# EAGLE board attiny85 (EAGLE 7.7.0)
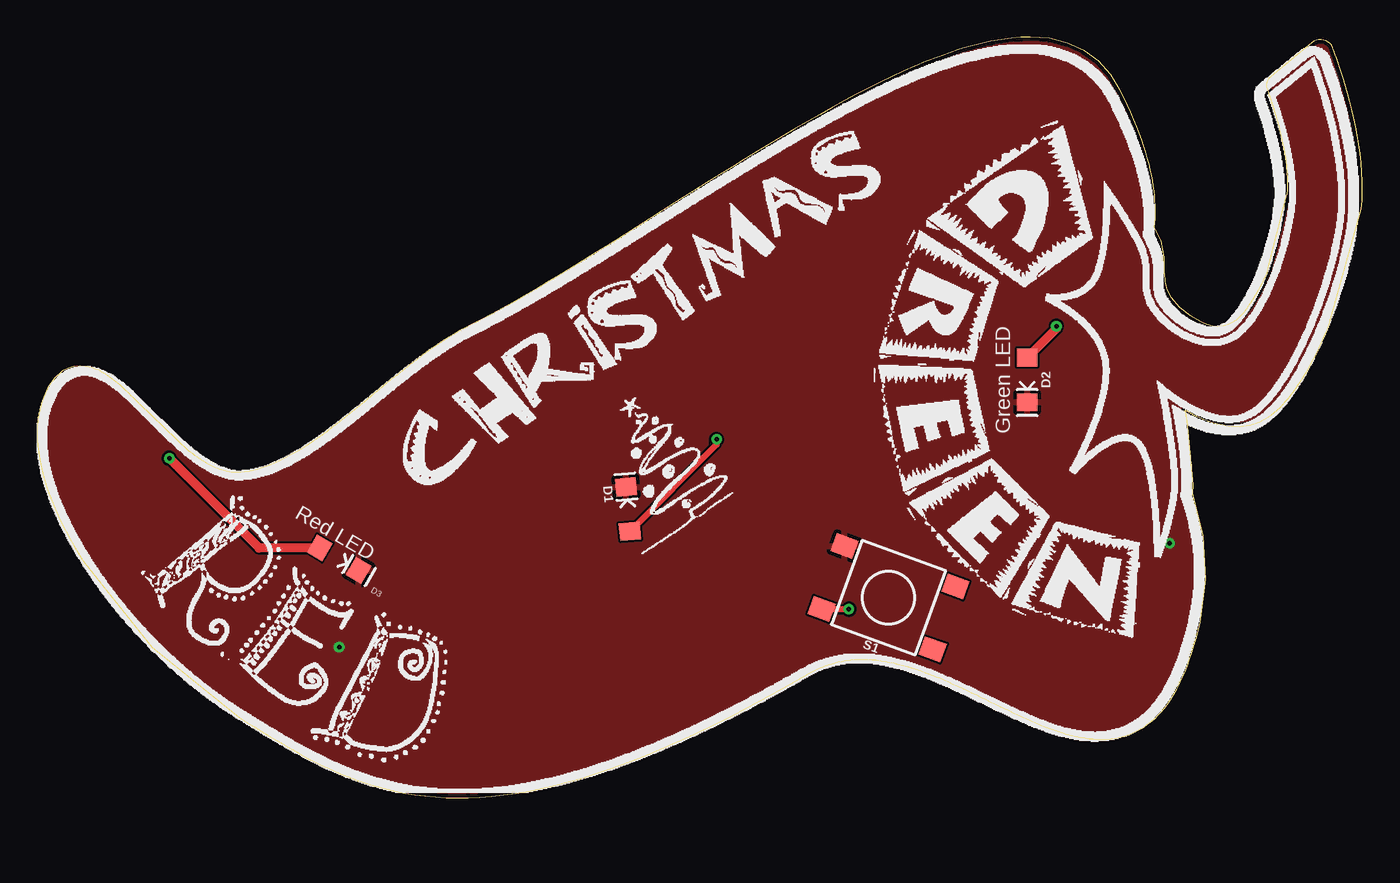
[diagram p0: board, top side]
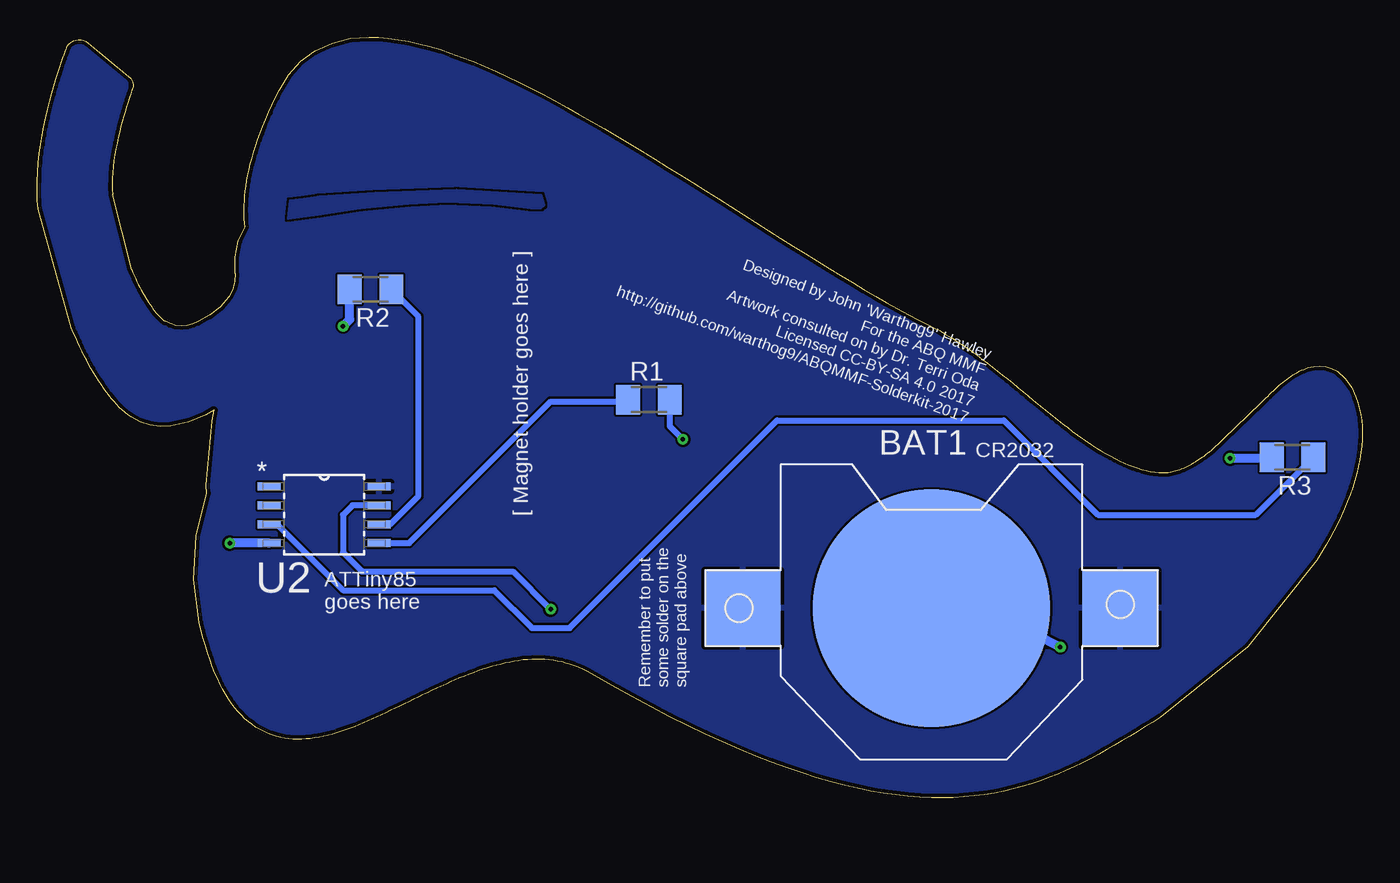
[diagram p1: board, bottom side, seen from below]

Size 89.17 x 51.2 mm. Coordinates in mm from the lower left corner, seen from the top.
Outline: 66.83,51.2 66.19,51.18 65.54,51.13 64.87,51.04 64.19,50.92 63.49,50.77 62.78,50.58 62.07,50.37 61.33,50.13 60.59,49.86 59.84,49.57 59.07,49.25 58.3,48.91 57.52,48.55 56.73,48.17 55.93,47.77 55.12,47.35 54.31,46.91 53.49,46.46 52.66,46 51.83,45.52 50.99,45.03 50.15,44.53 49.31,44.02 48.46,43.51 47.6,42.99 46.75,42.46 45.9,41.93 45.04,41.39 44.19,40.85 43.34,40.32 42.49,39.78 41.64,39.24 40.8,38.71 39.96,38.18 39.13,37.65 38.3,37.13 37.48,36.62 36.67,36.11 35.87,35.62 35.07,35.14 34.29,34.67 33.52,34.21 32.76,33.77 32.01,33.34 31.28,32.93 30.56,32.54 29.85,32.17 29.16,31.82 28.8,31.63 28.43,31.43 28.07,31.23 27.71,31.01 27.36,30.78 27,30.55 26.65,30.31 26.29,30.06 25.94,29.8 25.59,29.54 25.24,29.28 24.9,29.01 24.55,28.74 24.21,28.46 23.86,28.18 23.52,27.9 23.18,27.62 22.84,27.34 22.5,27.06 22.17,26.79 21.83,26.51 21.49,26.23 21.16,25.96 20.83,25.69 20.49,25.43 20.16,25.17 19.83,24.92 19.5,24.67 19.17,24.43 18.85,24.2 18.52,23.98 18.2,23.76 17.88,23.55 17.56,23.36 17.25,23.17 16.94,23 16.62,22.83 16.32,22.68 16.01,22.54 15.71,22.41 15.41,22.29 15.12,22.19 14.82,22.1 14.53,22.03 14.25,21.97 13.97,21.93 13.69,21.9 13.42,21.89 13.3,21.89 13.17,21.9 13.05,21.92 12.93,21.93 12.8,21.96 12.67,21.99 12.54,22.03 12.41,22.07 12.28,22.11 12.15,22.16 12.01,22.22 11.88,22.28 11.74,22.34 11.61,22.41 11.47,22.49 11.33,22.57 11.19,22.65 11.06,22.74 10.92,22.83 10.78,22.93 10.63,23.03 10.49,23.13 10.35,23.24 10.21,23.35 6.87,26.53 6.73,26.67 6.6,26.8 6.47,26.93 6.34,27.06 6.21,27.19 6.08,27.31 5.96,27.43 5.83,27.55 5.7,27.67 5.57,27.78 5.44,27.89 5.31,28 5.18,28.1 5.05,28.2 4.92,28.3 4.79,28.39 4.65,28.48 4.52,28.56 4.38,28.64 4.24,28.71 4.1,28.78 3.95,28.84 3.81,28.9 3.66,28.95 3.26,29.04 2.85,29.06 2.45,29.01 2.06,28.9 1.7,28.72 1.15,28.22 0.73,27.63 0.44,26.97 0.31,26.59 0.2,26.2 0.11,25.8 0.05,25.4 0.01,24.98 0,24.55 0.01,24.12 0.04,23.68 0.09,23.23 0.17,22.78 0.26,22.31 0.37,21.85 0.5,21.38 0.66,20.9 0.82,20.42 1.01,19.94 1.21,19.45 1.43,18.96 1.67,18.47 1.92,17.97 2.19,17.47 2.46,16.98 2.76,16.48 3.06,15.98 7.69,10.18 13.6,5.41 14.11,5.09 14.62,4.77 15.14,4.45 15.65,4.14 16.17,3.83 16.69,3.52 17.21,3.22 17.74,2.93 18.28,2.64 18.82,2.37 19.36,2.1 19.92,1.84 20.48,1.6 21.06,1.37 21.64,1.15 22.24,0.95 22.85,0.77 23.47,0.6 24.1,0.45 24.75,0.32 25.42,0.21 26.1,0.12 26.8,0.06 27.51,0.02 28.25,0 29,0.01 29.77,0.04 30.56,0.1 31.37,0.19 32.21,0.31 33.06,0.46 33.94,0.64 34.84,0.85 35.77,1.09 36.72,1.36 37.7,1.67 38.71,2.02 39.75,2.4 40.81,2.81 41.91,3.27 43.04,3.76 44.2,4.29 45.39,4.86 46.61,5.47 47.88,6.12 49.17,6.82 50.51,7.56 51.88,8.34 52.16,8.5 52.44,8.64 52.73,8.77 53.01,8.88 53.29,8.98 53.58,9.07 53.86,9.14 54.15,9.2 54.44,9.25 54.72,9.29 55.01,9.31 55.3,9.32 55.59,9.33 55.88,9.32 56.18,9.3 56.47,9.27 56.76,9.24 57.06,9.19 57.36,9.14 57.66,9.07 57.96,9 58.26,8.92 58.57,8.84 58.87,8.74 59.18,8.65 59.49,8.54 59.8,8.43 60.11,8.31 60.42,8.19 60.73,8.06 61.04,7.93 61.35,7.8 61.66,7.66 61.98,7.52 62.29,7.37 62.6,7.22 62.91,7.08 63.22,6.93 63.53,6.78 63.84,6.62 64.15,6.47 64.46,6.32 64.76,6.17 65.07,6.02 65.38,5.88 65.68,5.73 65.99,5.59 66.29,5.45 66.59,5.31 66.9,5.18 67.2,5.05 67.5,4.92 67.8,4.8 68.1,4.68 68.4,4.57 68.7,4.47 69,4.37 69.3,4.29 69.6,4.21 69.9,4.14 70.19,4.08 70.49,4.03 70.78,3.99 71.08,3.96 71.37,3.95 71.66,3.94 71.95,3.96 72.24,3.98 72.53,4.02 72.81,4.08 73.1,4.15 73.38,4.24 73.66,4.35 73.93,4.47 74.19,4.61 74.45,4.76 74.7,4.94 74.95,5.13 75.19,5.33 75.42,5.56 75.64,5.8 75.86,6.06 76.07,6.34 76.28,6.64 76.48,6.96 76.67,7.3 76.85,7.66 77.03,8.03 77.21,8.43 77.37,8.85 77.54,9.29 77.69,9.75 77.84,10.23 77.98,10.73 78.12,11.25 78.25,11.8 78.65,14.71 78.48,17.64 77.75,20.5 77.8,21.07 77.39,25.38 77.26,26.1 77.82,25.76 78.96,25.28 80.18,25.02 80.89,24.99 81.58,25.09 82.25,25.31 82.85,25.64 83.05,25.78 83.25,25.94 83.44,26.1 83.63,26.28 83.81,26.47 84,26.67 84.18,26.88 84.35,27.1 84.53,27.33 84.7,27.56 84.87,27.81 85.04,28.06 85.2,28.33 85.36,28.6 85.52,28.88 85.68,29.16 85.83,29.45 85.99,29.75 86.14,30.05 86.29,30.36 86.43,30.68 86.58,31 86.72,31.32 86.86,31.65 89.1,39.62 89.15,40.23 89.17,40.85 89.16,41.48 89.13,42.11 89.08,42.74 89.01,43.36 88.92,43.98 88.82,44.59 88.71,45.19 88.59,45.77 88.46,46.33 88.32,46.87 88.18,47.39 88.05,47.88 87.91,48.33 87.78,48.75 87.66,49.14 87.54,49.48 87.44,49.78 87.35,50.03 87.27,50.23 87.22,50.38 87.18,50.47 87.17,50.5 87.1,50.64 86.99,50.76 86.87,50.87 86.72,50.95 86.56,51 86.39,51.02 86.22,51.01 86.05,50.98 85.9,50.91 85.76,50.82 83,48.55 82.88,48.43 82.79,48.3 82.74,48.15 82.71,48 82.72,47.85 82.76,47.7 82.77,47.68 82.79,47.61 82.83,47.51 82.88,47.37 82.94,47.19 83.01,46.98 83.08,46.74 83.17,46.48 83.25,46.19 83.34,45.87 83.44,45.54 83.53,45.19 83.62,44.83 83.71,44.45 83.79,44.07 83.87,43.67 83.94,43.28 84,42.88 84.05,42.48 84.09,42.09 84.11,41.7 84.13,41.32 84.12,40.95 84.09,40.59 82.8,35.55 82.72,35.35 82.63,35.14 82.54,34.95 82.45,34.75 82.36,34.56 82.26,34.37 82.17,34.19 82.07,34.01 81.97,33.83 81.87,33.67 81.77,33.5 81.67,33.35 81.57,33.2 81.47,33.06 81.38,32.92 81.28,32.79 81.18,32.67 81.09,32.56 80.99,32.46 80.9,32.36 80.81,32.28 80.73,32.2 80.64,32.13 80.56,32.08 80.22,31.91 79.85,31.8 79.46,31.76 79.07,31.79 78.69,31.89 78.34,32.05 77.56,32.49 76.87,33.05 76.29,33.71 76.02,34.2 75.88,34.74 75.86,35.29 75.85,36.38 75.63,37.46 75.18,38.42 75.21,38.7 75.23,38.98 75.24,39.27 75.24,39.57 75.23,39.87 75.22,40.19 75.19,40.51 75.16,40.84 75.11,41.18 75.06,41.53 74.99,41.89 74.91,42.26 74.82,42.64 74.72,43.04 74.6,43.44 74.47,43.86 74.32,44.29 74.16,44.73 73.98,45.19 73.79,45.65 73.58,46.14 73.36,46.64 73.12,47.15 72.86,47.67 72.25,48.68 71.44,49.56 70.45,50.28 69.32,50.8 68.1,51.11 66.83,51.2
Copper layers (1*16): Top 0.035mm / dielectric 1.5mm / Bottom 0.035mm
Design rules "default *": minimum track width 6mil, minimum drill 12mil, track to track 6mil, track to pad 6mil, pad to pad 6mil, via to via 6mil, smd to smd 6mil, copper to edge 10mil, drill to drill 8mil, minimum pad ring 10mil, minimum via ring 8mil, stop-mask expansion 4mil, vias tented up to drill 0mil, thermal gap 10mil

## Footprints (pad centres in the part's own frame; a part is rotated, then mirrored left to right if it is on the bottom)
CR2032-SMD = smd 5.08 x 5.08: +$1 -12.7,0; +$2 12.7,0 | smd 16.002 x 16.002: - 0,0
LED-1206 = smd 1.2 x 1.4: A -1.5,0; C 1.5,0
M1206 = smd 1.6 x 2: 1 -1.4,0; 2 1.4,0
TACTILE_SWITCH_SMD_6.2MM_TALL = smd 1.55 x 1.3: A1 -3.975,-2.25; A2 3.975,-2.25; B1 -3.975,2.25; B2 3.975,2.25
SOIC127P798X216-8N = smd 1.549 x 0.533: 1 -3.708,1.905; 2 -3.708,0.635; 3 -3.708,-0.635; 4 -3.708,-1.905; 5 3.708,-1.905; 6 3.708,-0.635; 7 3.708,0.635; 8 3.708,1.905

## Placement (x,y rotation side)
BAT1  [CR2032-SMD]  28.99,12.77 0 bottom
D1  [LED-1206]  39.75,19.43 95 top
D2  [LED-1206]  66.61,28.13 270 top
D3  [LED-1206]  20.32,16.06 330 top
R1  1k  [M1206]  48.01,26.8 0 bottom
R2  1k  [M1206]  66.74,34.23 180 bottom
R3  1k  [M1206]  4.7,22.92 180 bottom
S1  MOMENTARY-SWITCH-SPST-SMD-6.2MM-TALL  [TACTILE_SWITCH_SMD_6.2MM_TALL]  57.29,13.48 160 top
U2  ATTINY85V-10SU  [SOIC127P798X216-8N]  69.85,19.05 0 bottom

## Library data of the parts
BAT1 = adafruit-john modded
D1-D3 = SparkFun-LED
R1-R3 = adafruit
S1 = SparkFun-Switches; PROD_ID: SWCH-11966; SF_SKU: COM-12992
U2 = Atmel_By_element14_Batch_1-00; MPN: ATTINY85V-10SU; OC_FARNELL: 1455166; OC_NEWARK: 58M3799; PACKAGE: SOIC-8; SUPPLIER: Atmel

## Nets
GND: BAT1.- D1.C D2.C D3.C S1.A2 U2.4
N$1: D3.A R3.2
N$2: D2.A R2.2
N$3: R1.1 U2.5
N$4: R2.1 U2.6
N$5: D1.A R1.2
N$6: R3.1 U2.3
N$7: S1.B2 U2.7
VCC: BAT1.+$1 BAT1.+$2 U2.8

## Tracks (layer width: path | path; a pad name or v marks a point on that pad's centre or on a via)
GND  (via drill 0.3)
  Bottom 0.61: BAT1.- 25.47,12.77 v20.32,10.16 | U2.4 v76.2,17.14
  pour Top: 0,0 101.6,0 101.6,50.8 0,50.8
N$1  (via drill 0.3)
  Top 0.61: D3.A 14.93,16.82 v8.89,22.86
  Bottom 0.61: v8.89,22.86 6.16,22.86 R3.2
N$2  (via drill 0.3)
  Top 0.61: D2.A 68.58,31.6 v68.58,31.75
  Bottom 0.61: v68.58,31.75 68.14,32.19 R2.2
N$3
  Bottom 0.406: R1.1 49.53,26.67 54.61,26.67 64.14,17.14 U2.5
N$4
  Bottom 0.406: U2.6 65.41,18.41 63.5,20.32 63.5,32.39 R2.1
N$5  (via drill 0.3)
  Top 0.406: v45.72,24.13 45.72,23.77 D1.A
  Bottom 0.406: R1.2 46.61,25.02 v45.72,24.13
N$6
  Bottom 0.406: U2.3 73.03,18.41 68.58,13.97 58.42,13.97 55.88,11.43 53.34,11.43 39.37,25.4 24.13,25.4 17.78,19.05 7.17,19.05 R3.1
N$7  (via drill 0.3)
  Top 0.406: v54.61,12.7 52.8,12.7 S1.B2
  Bottom 0.406: U2.7 67.95,19.68 68.58,19.05 68.58,16.51 67.31,15.24 57.15,15.24 v54.61,12.7
NTOUCH
  pour Bottom: 55.25,40.58 60.96,40.89 66.42,40.7 70.17,40.45 70.99,40.32 72.14,40.19 72.26,38.99 70.29,39.24 67.44,39.69 64.2,40 61.6,40.13 58.42,40 55.94,39.69 55.31,39.69 55.05,39.88
VCC
  pour Bottom (rank 6): 0,0 101.6,0 101.6,50.8 0,50.8

## Text on the board
tPlace: Green LED | Red LED
bPlace: [ Magnet holder goes here ] | Designed by John 'Warthog9' Hawley / For the ABQ MMF / Artwork consulted on by Dr. Terri Oda / Licensed CC-BY-SA 4.0 2017 / http://github.com/warthog9/ABQMMF-Solderkit-2017 | CR2032 | ATTiny85 / goes here | Remember to put / some solder on the / square pad above